# Altium PCB XiBank_V1.0.PcbDoc
Units mm, origin at the board's own origin, x right, y up, seen from the top; angles counter-clockwise.
Board outline 65 x 22.4 mm, 2 copper layers (Top Layer, Bottom Layer), stack 1.07 mm thick; 46 components, 30 nets, 154 pads, 145 vias.
Unrouted connection lines stored in the file: 27.
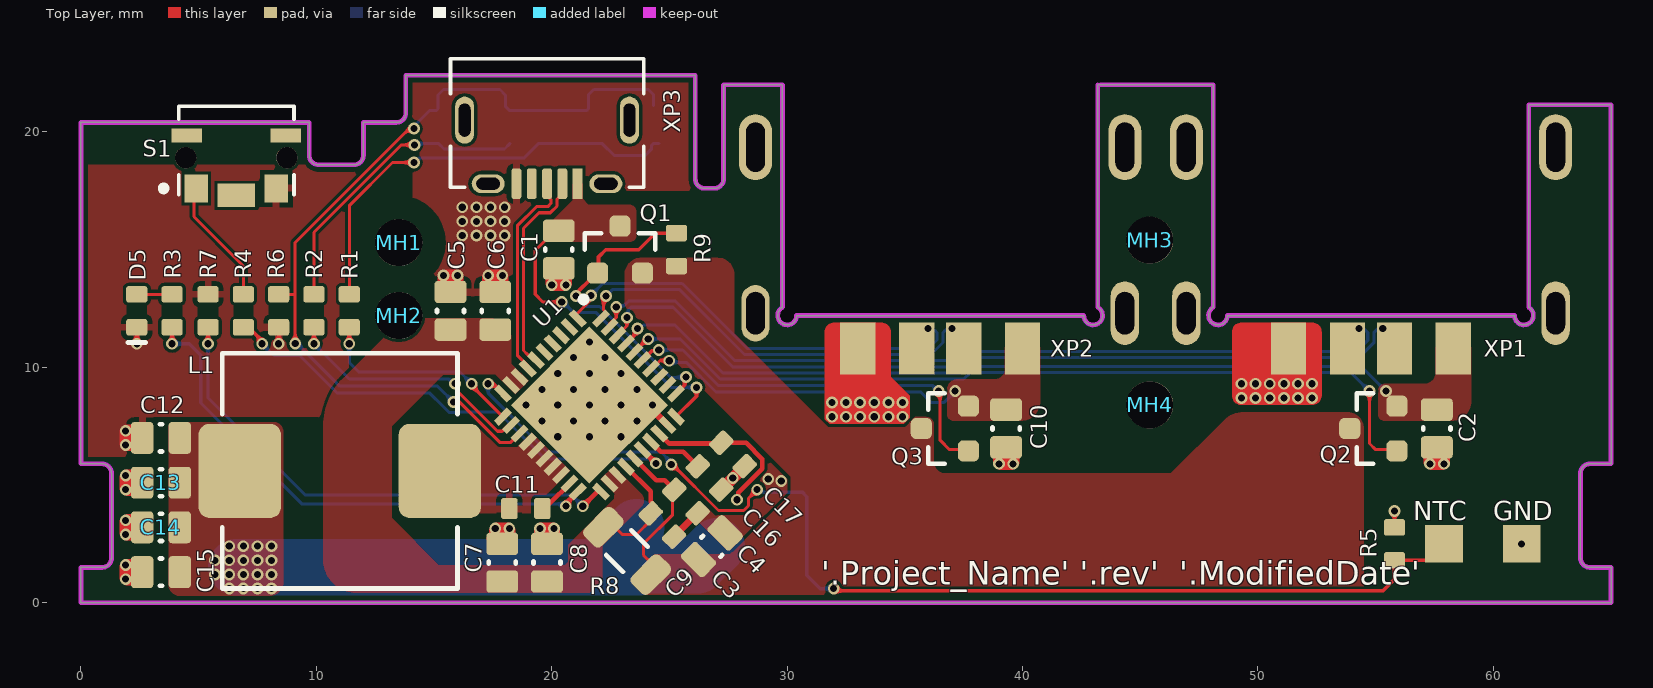
[diagram p0: Top Layer view]
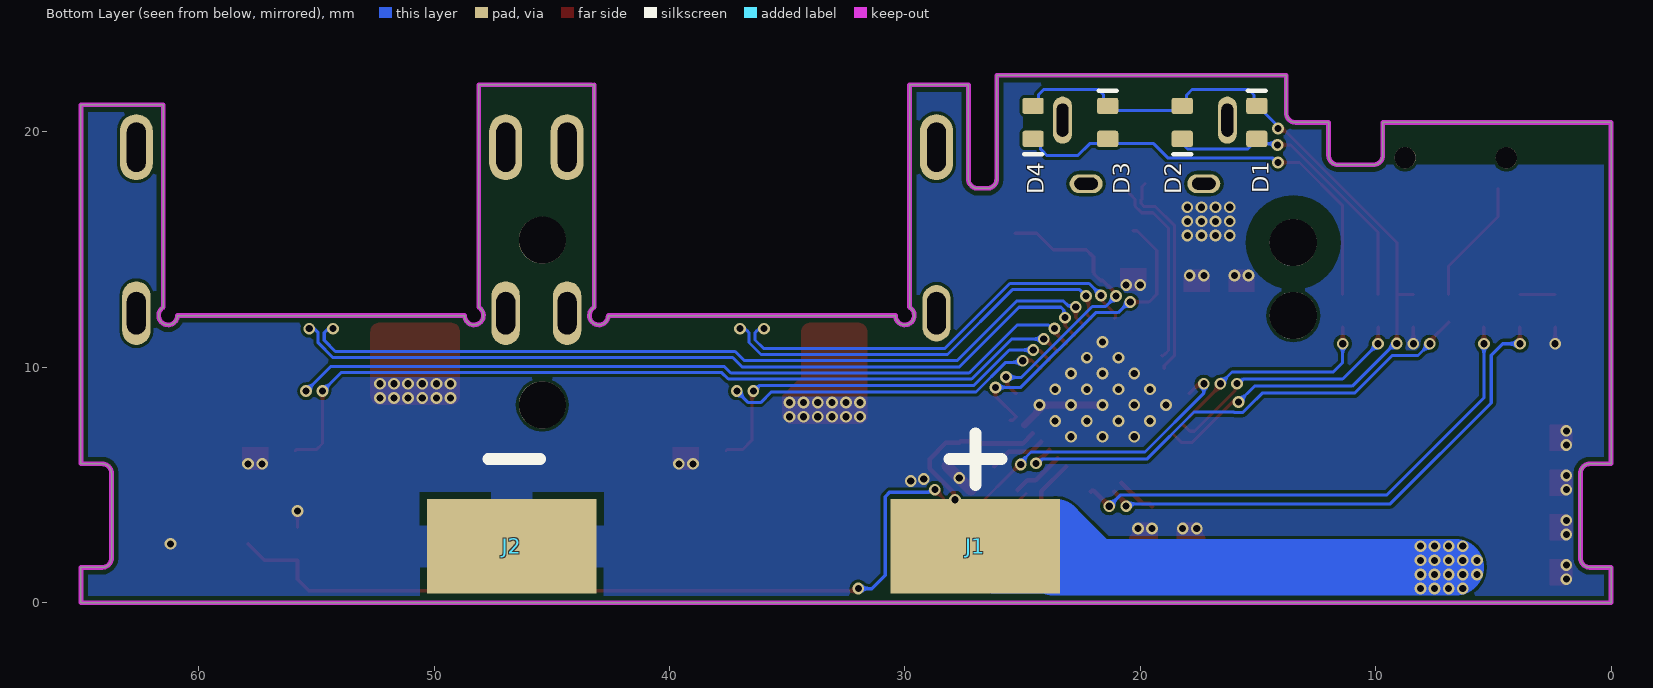
[diagram p1: Bottom Layer view, seen from below]
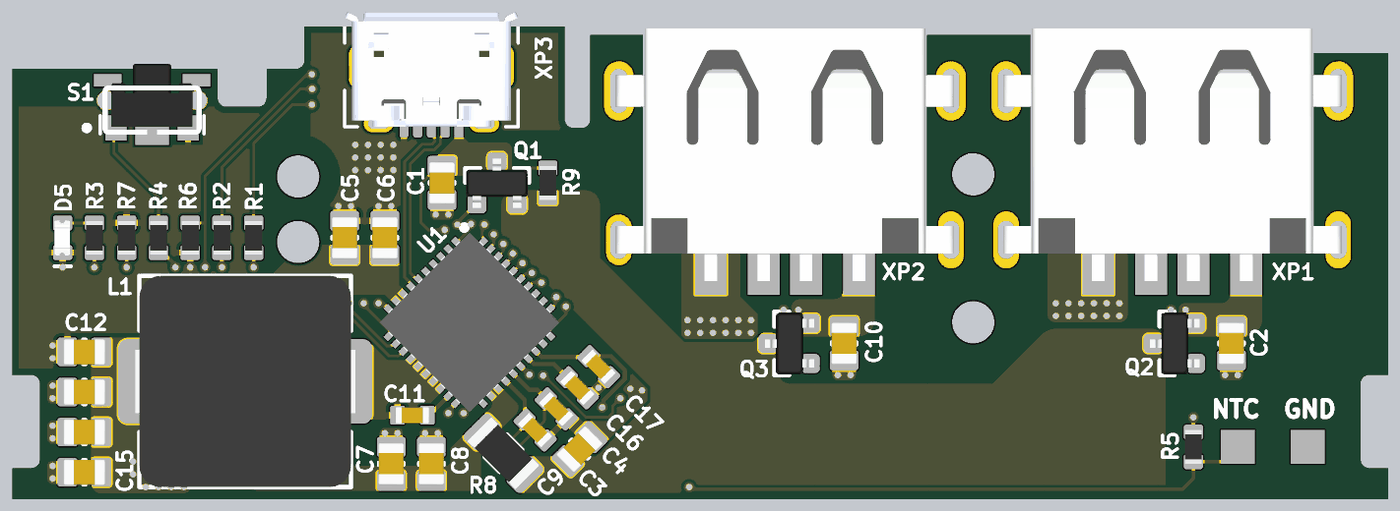
[diagram p2: 3D render of the assembled board from above, using the file's embedded part models]
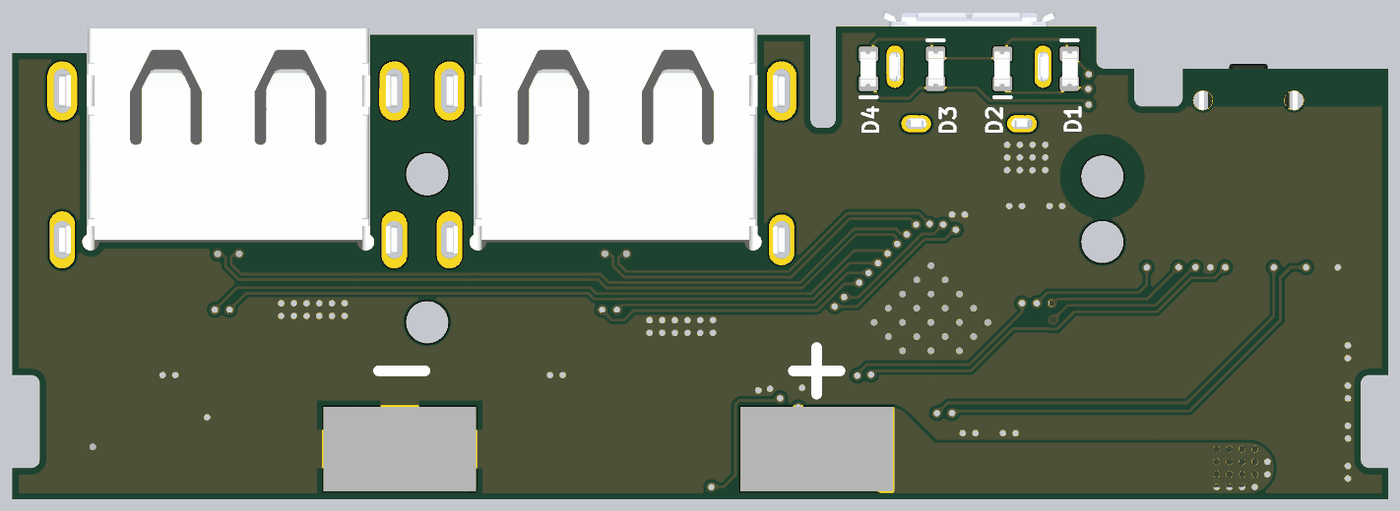
[diagram p3: 3D render of the assembled board from below, using the file's embedded part models]

## Layer stack, top to bottom
Top Solder: solder mask 0.01, Solder Resist, Dk 3.5
Top Layer: signal copper 0.035
Dielectric 1: dielectric 1, FR-4, Dk 4.8
Bottom Layer: signal copper 0.035
Bottom Solder: solder mask 0.01, Solder Resist, Dk 3.5

## Board outline
0,1.5 0.9,1.5 ccw(c0.9,1.9) 1.3,1.9 1.3,5.5 ccw(c0.9,5.5) 0.9,5.9 0,5.9 0,20.4 9.7,20.4 9.7,19 ccw(c10.1,19) 10.1,18.6 11.6,18.6 ccw(c11.6,19) 12,19 12,20.4 13.4,20.4 ccw(c13.4,20.8) 13.8,20.8 13.8,22.4 26.1,22.4 26.1,18 ccw(c26.5,18) 26.5,17.6 26.9,17.6 ccw(c26.9,18) 27.3,18 27.3,22 29.8,22 29.8,12.546 ccw(c30,12.2) 30.4,12.2 42.6,12.2 ccw(c43,12.2) 43.2,12.546 43.2,22 48.1,22 48.1,12.546 ccw(c48.3,12.2) 48.7,12.2 60.9,12.2 ccw(c61.3,12.2) 61.5,12.546 61.5,21.15 65,21.15 65,5.9 64.1,5.9 ccw(c64.1,5.5) 63.7,5.5 63.7,1.9 ccw(c64.1,1.9) 64.1,1.5 65,1.5 65,0 0,0

## Design rules (kind name [scope] priority, off if disabled: settings)
Clearance Clearance_Keep_Out [OnLayer('Keep-Out Layer') vs not InComponent('S1')] p1: gap=0.2 ignorepadtopadclearanceinfootprint=FALSE
Clearance Clearance_MH [InComponent('MH1')] p2: gap=1 ignorepadtopadclearanceinfootprint=FALSE
Clearance [All] p3: gap=0.13 ignorepadtopadclearanceinfootprint=FALSE
DiffPairsRouting [All] p1: maxlimit=0.13 minlimit=0.13 mostfreqgap=0.13 toplayer_minwidth=0.13 toplayer_maxwidth=0.13 toplayer_prefwidth=0.13 bottomlayer_minwidth=0.13 bottomlayer_maxwidth=0.13 bottomlayer_prefwidth=0.13 maxuncoupledlength=12.7
MinimumSolderMaskSliver [All] p1: minsoldermaskwidth=0.07
PolygonConnect PolygonConnect_Vias [isvia] p1: connectstyle=Direct reliefconductorwidth=0.254 reliefentries=4 polygonreliefangle="90 Angle" airgapwidth=0.254
PolygonConnect PolygonConnect_GND_BAT_Pad [InComponent('J2') vs IsNamedPolygon('GND_BOT')] p2: connectstyle=Relief reliefconductorwidth=1.8 reliefentries=4 polygonreliefangle="90 Angle" airgapwidth=0.3
PolygonConnect PolygonConnect_Relied [IsNamedPolygon('GND_TOP') or InComponent('C11')] p3: connectstyle=Relief reliefconductorwidth=0.3 reliefentries=4 polygonreliefangle="90 Angle" airgapwidth=0.2
PolygonConnect PolygonConnect_Direct [All] p4: connectstyle=Direct reliefconductorwidth=0.5 reliefentries=4 polygonreliefangle="90 Angle" airgapwidth=0.2
RoutingVias [All] p1: holewidth=0.711 width=1.27 viastyle="Through Hole" minholewidth=0.3 minwidth=0.5 maxholewidth=0.711 maxwidth=1.27
SilkToSilkClearance [All] p1: silktosilkclearance=0.1
SilkToSolderMaskClearance [IsPad] p1: minsilkscreentomaskgap=0.15 clearancetoexposedcopper=TRUE
SolderMaskExpansion SolderMaskExpansion_Vias [isvia] p1: expansion=0.07 istentingtop=TRUE
SolderMaskExpansion [All] p2: expansion=0.07 istentingtop=FALSE
Width [All] p1: maxlimit=3 minlimit=0.13 preferedwidth=0.2
26 further rules are at their usual default settings.

## Classes and differential pairs
differential pair DB: +DB_P -DB_N
differential pair DA2: +DA2_P -DA2_N
differential pair DA1: +DA1_P -DA1_N

## Components (designator, comment, footprint, x,y, rotation, side; value= is the part's Value field where it differs from the comment)
C1 "10u" CC0805#1 20.3,15 r270 top
C2 "10u" CC0805#1 57.6,7.4 r270 top
C3 "100n" CC0603#1 24.7,3.3 r315 top
C4 "100n" CC0603#1 25.7,4.3 r315 top
C5 "22u" CC0805#1 15.7,12.4 r90 top
C6 "22u" CC0805#1 17.6,12.4 r90 top
C7 "22u" CC0805#2 17.9,1.7 r90 top
C8 "22u" CC0805#2 19.8,1.7 r90 top
C9 "22u" CC0805#2 26.8,2.4 r45 top
C10 "10u" CC0805#1 39.3,7.4 r270 top
C11 "100n" CC0603#2 18.9,4 r180 top
C12 "22u" CC0805#1 3.4,7 r180 top
C13 "22u" CC0805#1 3.4,5.1 r180 top
C14 "22u" CC0805#1 3.4,3.2 r180 top
C15 "22u" CC0805#1 3.4,1.3 r180 top
C16 "2.2uF" CC0603#1 26.7,5.3 r315 top
C17 "2.2uF" CC0603#1 27.7,6.3 r315 top
D1 "LTW-C191DS5" LED0603 15.05,20.4 r270 bottom
D2 "LTW-C191DS5" LED0603 18.217,20.4 r90 bottom
D3 "LTW-C191DS5" LED0603 21.383,20.4 r270 bottom
D4 "LTW-C191DS5" LED0603 24.55,20.4 r90 bottom
D5 "LTW-C191DS5" LED0603 2.375,12.4 r90 top
J1 "Header 1pin" "1 Hole" 27,2.4 r180 bottom
J2 "Header 1pin" "1 Hole" 46.7,2.4 r180 bottom
L1 "HPI1040-2R2" HPI1040100 11,5.6 r180 top value="2.2 uH"
MH1 "MH_3.5_NONPLATED" MH_3.5_NONPLATED 13.5,15.3 r0 top
MH2 "MH_3.5_NONPLATED" MH_3.5_NONPLATED 13.5,12.2 r0 top
MH3 "MH_3.5_NONPLATED" MH_3.5_NONPLATED 45.4,15.4 r0 top
MH4 "MH_3.5_NONPLATED" MH_3.5_NONPLATED 45.4,8.4 r0 top
Q1 "IRLML6402TRPBF" SOT23-3 22.9,15 r270 top
Q2 "AO3416" SOT23-3 54.9,7.4 r0 top
Q3 "AO3416" SOT23-3 36.7,7.4 r0 top
R1 "100R" RC0603 11.4,12.4 r90 top
R2 "100R" RC0603 9.9,12.4 r90 top
R3 "100R" RC0603 3.875,12.4 r90 top
R4 "1k" RC0603 6.9,12.4 r90 top
R5 "82k" RC0603 55.8,2.5 r90 top
R6 "NC" RC0603 8.4,12.4 r90 top
R7 "169k" RC0603 5.4,12.4 r90 top
R8 "0.01R" RC1206 23.2,2.2 r315 top
R9 "10k" RC0603 25.3,15 r270 top
S1 "" SW_LS10N2T_CIT 6.6,19.203 r180 top
U1 "IP5328P" QFN50P600X600X80-41N 21.599,8.393 r315 top
XP1 "USB-A Conn" 0480372200#1 54.8,14.975 r0 top
XP2 "USB-A Conn" 0480372200#2 36.5,14.975 r0 top
XP3 "ZX80-B-5P" 10118194-0001LF 19.8,20.5 r180 top

## Footprints (in the part's own frame and the unit in brackets; to place one, negate y for a bottom-side part, rotate by r counter-clockwise, add the part's x,y. Pads: shape width x height; smd on the part's side, far side on the other; paste and mask are expansions set on the pad)
"1 Hole" [mm] "1 Hole"
  rect 7.2x4 smd: 1(0,0)
10118194-0001LF [mm] "Micro USB B Right angled Socket"
  rect 0.42x1.3 smd: 1(-1.3,2.7)
  rrect50% 0.42x1.3 smd: 2(-0.65,2.7) 3(0,2.7) 4(0.65,2.7) 5(1.3,2.7)
  oval 1.4x0.8 hole 0.5 slot 1 at 0 deg: 6(2.5,2.7) 9(-2.5,2.7)
  oval 0.8x2 hole 0.5 slot 1.4 at 90 deg: 7(3.5,0) 8(-3.5,0)
  silkscreen extent -4.1,-2.6 4.1,2.85, body extent -4.1,-2.58 4.1,2.85, height 2.67
0480372200#1 [mm] "USB-A (USB TYPE-A) USB 2.0 Plug Connector 4 Position Surface Mount, Right Angle; Through Hole"
  rect 1.5x2.2 smd: 1(3.499,-4.175) 2(1,-4.175) 3(-1,-4.175) 4(-3.501,-4.175)
  oval 1.2x2.7 hole 0.8 slot 1.8 at 90 deg: 5(-7.845,-2.675) 5(7.845,-2.675)
  oval 1.4x2.8 hole 0.8 slot 2.1 at 90 deg: 6(-7.845,4.375) 6(7.845,4.375)
  body extent -8,-4.62 7.99,7.33, height 3.76
0480372200#2 [mm] "USB-A (USB TYPE-A) USB 2.0 Plug Connector 4 Position Surface Mount, Right Angle; Through Hole"
  rect 1.5x2.2 smd: 1(3.499,-4.175) 2(1,-4.175) 3(-1,-4.175) 4(-3.501,-4.175)
  oval 1.2x2.4 hole 0.8 slot 1.8 at 90 deg: 5(-7.845,-2.675)
  oval 1.2x2.7 hole 0.8 slot 1.8 at 90 deg: 5(7.845,-2.675)
  oval 1.4x2.8 hole 0.8 slot 2.1 at 90 deg: 6(-7.845,4.375) 6(7.845,4.375)
  body extent -8,-4.62 7.99,7.33, height 3.76
CC0603#1 [mm] "Chip Capacitor, 2-Leads, Body 1.6x0.8mm"
  rrect30% 0.7x0.9 smd: 1(-0.7,0) 2(0.7,0)
  Top Layer pour cut-out: -0.483,0.432 -0.483,-0.432 0.483,-0.432 0.483,0.432
  body extent -0.8,-0.4 0.8,0.4, height 0.9
CC0603#2 [mm] "Chip Capacitor, 2-Leads, Body 1.6x0.8mm"
  rrect30% 0.7x0.9 smd: 1(-0.7,0) 2(0.7,0)
  body extent -0.8,-0.4 0.8,0.4, height 0.9
CC0805#1 [mm] "Chip Capacitor, 2-Leads, Body 2.0x1.25mm"
  rrect30% 0.95x1.35 smd: 1(-0.8,0) 2(0.8,0)
  Top Layer pour cut-out: -0.325,0.525 0.325,0.525 0.325,-0.525 -0.325,-0.525
  silkscreen extent -0.05,-0.57 0.05,0.58, body extent -1,-0.62 1,0.63, height 1.35
CC0805#2 [mm] "Chip Capacitor, 2-Leads, Body 2.0x1.25mm"
  rrect30% 0.95x1.35 smd: 1(-0.8,0) 2(0.8,0)
  silkscreen extent -0.05,-0.57 0.05,0.58, body extent -1,-0.62 1,0.63, height 1.35
HPI1040100 [mm]
  rrect26% 3.5x4 smd: 1(-4.25,0) 2(4.25,0)
  silkscreen extent -5,-5 5,5, body extent -5.2,-5 5.2,5, height 4.01
LED0603 [mm] "Molded Diode, 2-Leads, Body"
  rrect30% 0.7x0.9 smd: 1(-0.7,0) 2(0.7,0)
  Top Layer pour cut-out: -0.483,0.432 -0.483,-0.432 0.483,-0.432 0.483,0.432
  silkscreen extent -1.35,-0.38 -1.35,0.37, body extent -0.83,-0.34 0.82,0.38, height 0.68
MH_3.5_NONPLATED [mm] "Mounting hole footprint not plated, Misc"
  round 2 hole 2 unplated: 0(0,0)
QFN50P600X600X80-41N [mm]
  rect 0.8x0.3 smd mask+0.05: 1(-2.95,2.25) 2(-2.95,1.75) 3(-2.95,1.25) 4(-2.95,0.75) 5(-2.95,0.25) 6(-2.95,-0.25) 7(-2.95,-0.75) 8(-2.95,-1.25) 9(-2.95,-1.75) 10(-2.95,-2.25) 21(2.95,-2.25) 22(2.95,-1.75) 23(2.95,-1.25) 24(2.95,-0.75) 25(2.95,-0.25) 26(2.95,0.25) 27(2.95,0.75) 28(2.95,1.25) 29(2.95,1.75) 30(2.95,2.25)
  rect 0.3x0.8 smd mask+0.05: 11(-2.25,-2.95) 12(-1.75,-2.95) 13(-1.25,-2.95) 14(-0.75,-2.95) 15(-0.25,-2.95) 16(0.25,-2.95) 17(0.75,-2.95) 18(1.25,-2.95) 19(1.75,-2.95) 20(2.25,-2.95) 31(2.25,2.95) 32(1.75,2.95) 33(1.25,2.95) 34(0.75,2.95) 35(0.25,2.95) 36(-0.25,2.95) 37(-0.75,2.95) 38(-1.25,2.95) 39(-1.75,2.95) 40(-2.25,2.95)
  rect 4.72x4.72 smd mask+0.05: 41(0,0)
  silkscreen extent -3.47,2.88 -3.23,3.12, body extent -3.05,-3.05 3.05,3.05, height 0.8
RC0603 [mm] "Chip Resistor, 2-Leads, Body 1.6x0.8mm, IPC Medium Density"
  rrect30% 0.7x0.9 smd: 1(-0.7,0) 2(0.7,0)
  Top Layer pour cut-out: -0.483,0.432 -0.483,-0.432 0.483,-0.432 0.483,0.432
  body extent -0.8,-0.4 0.8,0.4, height 0.49
RC1206 [mm] "Chip Resistor, 2-Leads, Body 3.1x1.6mm, IPC Medium Density"
  rrect50% 1.05x1.7 smd: 1(-1.425,0) 2(1.425,0)
  silkscreen extent -0.5,-0.75 0.5,0.75, body extent -1.6,-0.8 1.6,0.8, height 0.55
SOT23-3 [mm] "SOT23, 3-Leads, Body 3,0x2,6mm (max), Pitch 0,95mm, IPC Medium Density"
  rrect50% 0.9x0.9 smd: 1(1,-0.95) 2(1,0.95) 3(-1,0)
  silkscreen extent -0.7,-1.5 0,1.5, body extent -1.15,-1.46 1.19,1.46, height 1
SW_LS10N2T_CIT [mm]
  rect 1x1.2 smd: 1(1.7,1.603) 2(-1.7,1.603)
  round 0.9 hole 0.9 mask+0.05: 3(-2.15,0.303) 4(2.15,0.303)
  rect 1.3x0.6 smd: 5(-2.1,-0.647) 6(2.1,-0.647)
  rect 1.6x1 smd: 7(0,1.903)
  silkscreen extent -2.45,-1.88 3.19,1.88, body extent -2.34,-1.42 2.34,1.93, height 1.87

## Part data
C1 C2 C10: library part CC0805K-X7R-10V0-10U, "10 µF ±10% 25V Ceramic Capacitor X5R 0805 (2012 Metric)", Case=0805, Manufacturer="Samsung Electro-Mechanics", Manufacturer Part Number=CL21A106KAYNNNE, Temperature="-55 - +85 C", Tolerance=10%, Voltage=25V, Component Type=Standard, ComponentLink2Description=Datasheet, ComponentLink2URL=http://www.yageo.com/pdf/UPY-GPHC_X7R_6.3V-to-50V_3.pdf, Material=X5R, Pb Free=Yes
C3 C4 C11: library part CC0603K-X7R-50V0-100N, "0.1 µF ±10% 50V Ceramic Capacitor X7R 0603 (1608 Metric)", Case=0603, Manufacturer="Samsung Electro-Mechanics", Manufacturer Part Number=CL10B104KB8NNNC, Temperature="-55 - +125 C", Tolerance=10%, Voltage=50V, Component Type=Standard, ComponentLink2Description=Datasheet, Material=X7R, Pb Free=Yes
  C3 C4: ComponentLink2URL=http://www.yageo.com/pdf/UPY-GPHC_X7R_6.3V-to-50V_3.pdf
  C11: ComponentLink2URL=https://media.digikey.com/pdf/Data%20Sheets/Samsung%20PDFs/CL10B104KB8NNNC_Spec.pdf
C5 C6 C7 C8 C9: library part CC0805K-X7R-10V0-10U, "22 µF ±20% 25V Ceramic Capacitor X5R 0805 (2012 Metric)", Case=0805, Manufacturer="Samsung Electro-Mechanics", Manufacturer Part Number=CL21A226MAYNNNE, Temperature="-55 - +85 C", Tolerance=10%, Voltage=25V, Component Type=Standard, ComponentLink2Description=Datasheet, Material=X5R, Pb Free=Yes
  C5 C6 C7 C9: ComponentLink2URL=http://www.yageo.com/pdf/UPY-GPHC_X7R_6.3V-to-50V_3.pdf
  C8: ComponentLink2URL=https://media.digikey.com/pdf/Data%20Sheets/Samsung%20PDFs/CL21A226MAYNNNE_Spec.pdf
C12 C13 C14 C15: library part CC0805K-X7R-10V0-10U, "22 µF ±20% 16V Ceramic Capacitor X5R 0805 (2012 Metric)", Case=0805, Manufacturer="Samsung Electro-Mechanics", Manufacturer Part Number=CL21A226MOCLRNC, Temperature="-55 - +125 C", Tolerance=10%, Voltage=16V, Component Type=Standard, ComponentLink2Description=Datasheet, Material=X5R, Pb Free=Yes
  C12 C13 C15: ComponentLink2URL=http://www.yageo.com/pdf/UPY-GPHC_X7R_6.3V-to-50V_3.pdf
  C14: ComponentLink2URL=https://media.digikey.com/pdf/Data%20Sheets/Samsung%20PDFs/CL21A226MOCLRNC_Spec.pdf
C16 C17: library part CC0603K-X7R-50V0-100N, "2.2 µF ±10% 16V Ceramic Capacitor X5R 0603 (1608 Metric)", Case=0603, Manufacturer="Samsung Electro-Mechanics", Manufacturer Part Number=CL10A225KO8NNNC, Temperature="-55 - +85 C", Tolerance=10%, Voltage=16V, Component Type=Standard, ComponentLink2Description=Datasheet, Material=X5R, Pb Free=Yes
  C16: ComponentLink2URL=http://www.yageo.com/pdf/UPY-GPHC_X7R_6.3V-to-50V_3.pdf
  C17: ComponentLink2URL=https://media.digikey.com/pdf/Data%20Sheets/Samsung%20PDFs/CL10A225KO8NNNC_Spec.pdf
D1 D2 D3 D4 D5: library part TLMY1000-GS08, "White LED Indication - Discrete 2.93V 0603 (1608 Metric)", Case=LED0603, Color=White, Current=5mA, Manufacturer="Lite-On Inc.", Voltage=2.93V, Component Type=Standard, ComponentLink2Description=Datasheet, Manufacturer Part Number=LTW-C191DS5
  D1 D3 D4: ComponentLink2URL=http://www.vishay.com/docs/83172/tlmo1000.pdf
  D5: ComponentLink2URL=https://optoelectronics.liteon.com/upload/download/DS22-2006-062/LTW-C191DS5.PDF
J1 J2: library part HEADER_2.54_THR_1x1P_MV, "THRU header 1pins, MALE, Vertical, 2.54mm pitch", Manufacturer Part Number=TSW-101-07-L-S, Temperature="-40 - +105 C", Case=HEADER_2.54_THR_1x1P_MV, Component Type=Standard, ComponentLink2Description=Datasheet, ComponentLink2URL=http://suddendocs.samtec.com/catalog_english/tsw_th.pdf, Part Number=HEADER_2.54_THR_1x1P_MV, Pb Free=Yes, Pins number=1, Published=02-Jan-12, Publisher=dlitvinenko, STATUS=CHECKED
L1: library part PSDB1005NT681, "SMD Power Inductor, 2.2uH, 12A, 6.5mΩ", Case=10x10x3.8mm, DC Current=12A, DC Resistance=6.5mΩ, Manufacturer=FERROCORE, Temperature=-55...125°C, Tolerance=20%, Component Type=Standard, ComponentLink2Description=Datasheet, ComponentLink2URL=http://www.viking.tw/product/PSDB.pdf, Manufacturer Part Number=HPI1040-2R2, Part Number=HPI1040-2R2, Pb Free=Yes, Published=06.04.2014, Publisher=dlegkobyt, STATUS=CHECKED
MH1 MH2 MH3 MH4: "Mounting hole misc, non plated", Part Number=MH_3.5_NONPLATED
Q1: library part IRLML6402, "P-Channel 20 V 3.7A (Ta) 1.3W (Ta) Surface Mount Micro3™/SOT-23", Case=SOT23-3, Current=-3.7A, Manufacturer="Infineon Technologies", Temperature="-50 - +150 C", Voltage CEO=-20V, Analogs="AO3401A, AO3415, AO3407A", Component Type=Standard, ComponentLink2Description=Datasheet, ComponentLink2URL=https://www.infineon.com/dgdl/irlml6402pbf.pdf?fileId=5546d462533600a401535668d5c2263c, Manufacturer Part Number=IRLML6402TRPBF, Marking=E6RRA, Pb Free=Yes
Q2 Q3: library part IRLML2502GPbF, "N-Channel 20 V 6.5A (Ta) 1.4W (Ta) Surface Mount SOT-23-3", Case=SOT23-3, Current=6.5A, Manufacturer="Alpha & Omega Semiconductor Inc.", Temperature="-50 - +150 C", Voltage CEO=20V, Analogs=DMN3404L, Component Type=Standard, ComponentLink2Description=Datasheet, Manufacturer Part Number=AO3416, Pb Free=Yes
  Q2: ComponentLink2URL=https://media.digikey.com/pdf/Data%20Sheets/Alpha%20&%20Omega/AO3416.pdf
  Q3: ComponentLink2URL=http://www.irf.com/product-info/datasheets/data/irlml2502gpbf.pdf
R1 R2 R3: library part RC0603F-100R, "100 ±1% 0.1W, 1/10W Chip Resistor 0603 (1608 Metric) Moisture Resistant Thick Film", Case=0603, Manufacturer=YAGEO, Manufacturer Part Number=RC0603FR-07100RL, Power=1/10W, Temperature="-55 - +155 C", Tolerance=1%, Voltage=50V, Component Type=Standard, ComponentLink2Description=Datasheet, ComponentLink2URL=http://www.yageo.com/pdf/PYu-RC0603_51_RoHS_L_4.pdf, Pb Free=Yes
R4: library part RC0603F-1K, "1k ±1% 0.1W, 1/10W Chip Resistor 0603 (1608 Metric) Moisture Resistant Thick Film", Case=0603, Manufacturer=YAGEO, Manufacturer Part Number=RC0603FR-071KL, Power=1/10W, Temperature="-55 - +155 C", Tolerance=1%, Voltage=50V, Component Type=Standard, ComponentLink2Description=Datasheet, ComponentLink2URL=http://www.yageo.com/pdf/PYu-RC0603_51_RoHS_L_4.pdf, Pb Free=Yes
R5: library part RC0603F-82K, "82 kOhms ±1% 0.1W, 1/10W Chip Resistor 0603 (1608 Metric) Moisture Resistant Thick Film", Case=0603, Manufacturer=YAGEO, Manufacturer Part Number=RC0603FR-0782KL, Power=1/10W, Temperature="-55 - +155 C", Tolerance=1%, Voltage=50V, Component Type=Standard, ComponentLink2Description=Datasheet, ComponentLink2URL=https://www.yageo.com/upload/media/product/productsearch/datasheet/rchip/PYu-RC_Group_51_RoHS_L_11.pdf, Pb Free=Yes
R6: library part RC0603F-200K, "200k ±1% 0.1W, 1/10W Chip Resistor 0603 (1608 Metric) Moisture Resistant Thick Film", Case=0603, Manufacturer=YAGEO, Manufacturer Part Number=RC0603FR-07200KL, Power=1/10W, Temperature="-55 - +155 C", Tolerance=1%, Voltage=50V, Component Type=Standard, ComponentLink2Description=Datasheet, ComponentLink2URL=http://www.yageo.com/pdf/PYu-RC0603_51_RoHS_L_4.pdf, Pb Free=Yes
R7: library part RC0603F-200K, "169k ±1% 0.1W, 1/10W Chip Resistor 0603 (1608 Metric) Moisture Resistant Thick Film", Case=0603, Manufacturer=YAGEO, Manufacturer Part Number=RC0603FR-07169KL, Power=1/10W, Temperature="-55 - +155 C", Tolerance=1%, Voltage=50V, Component Type=Standard, ComponentLink2Description=Datasheet, ComponentLink2URL=http://www.yageo.com/pdf/PYu-RC0603_51_RoHS_L_4.pdf, Pb Free=Yes
R8: library part RC1206F-0R01, "10 mOhms ±1% 0.25W, 1/4W Chip Resistor 1206 (3216 Metric) Automotive AEC-Q200, Current Sense, Moisture Resistant Thick Film", Case=1206, Manufacturer=YAGEO, Manufacturer Part Number=RL1206FR-070R01L, Power=1/4W, Temperature="-55 - +155 C", Tolerance=1%, Voltage=200V, Component Type=Standard, ComponentLink2Description=Datasheet, ComponentLink2URL=https://www.yageo.com/upload/media/product/productsearch/datasheet/rchip/PYu-RL_Group_521_RoHS_L_2.pdf, Pb Free=Yes
R9: library part RC0603F-10K, "10k ±1% 0.1W, 1/10W Chip Resistor 0603 (1608 Metric) Moisture Resistant Thick Film", Case=0603, Manufacturer=YAGEO, Manufacturer Part Number=RC0603FR-0710KL, Power=1/10W, Temperature="-55 - +155 C", Tolerance=1%, Voltage=50V, Component Type=Standard, ComponentLink2Description=Datasheet, ComponentLink2URL=http://www.yageo.com/pdf/PYu-RC0603_51_RoHS_L_4.pdf, Pb Free=Yes
S1: library part LS10N2T, "Tactile Switch SPST-NO Side Actuated Surface Mount, Right Angle", Manufacturer=Citizen, C="Copyright (C) 2021 Accelerated Designs. All rights reserved", Copyright="Copyright (C) 2022 Ultra Librarian. All rights reserved.", Digi-Key_Part_Number_1=1642-1308-2-ND, Digi-Key_Part_Number_2=1642-1308-1-ND, Digi-Key_Part_Number_3=1642-1308-6-ND, Manufacturer Part Number=LS10N2T
U1: "Fully-Integrated Bi-directional PD3.0 and Fast Charge Power Bank SOC with Multiple Input and Output Ports", Manufacturer="INJOINIC Technology", Datasheet Link=https://datasheetspdf.com/pdf-file/1261761/Injoinic/IP5328P/1, Height=0.8mm, Manufacturer Part Number=IP5328P
XP1 XP2: library part 0480372200, "USB-A (USB TYPE-A) USB 2.0 Plug Connector 4 Position Surface Mount, Right Angle", Case="USB TYPE-A", Manufacturer=NULL, Temperature="-20 - +85 C", Component Type=Standard, ComponentLink2Description=Datasheet, Manufacturer Part Number=NULL, Pb Free=Yes, Pins number=4
  XP2: ComponentLink2URL=https://www.molex.com/pdm_docs/sd/480372200_sd.pdf
XP3: library part 10118194-0001LF, "Micro USB B Right Angled  Socket, SMD", Manufacturer=FCI, Temperature="-25 - +85 C", Case=10118194-0001LF, Component Type=Standard, ComponentLink2Description=Datasheet, ComponentLink2URL=http://portal.fciconnect.com/Comergent//fci/drawing/10118194.pdf, Manufacturer Part Number=10118194-0001LF, Pb Free=Yes, Pins number=5

## Free pads (board coordinates)
  rect 1.6x1.6 smd: 3(57.9,2.5) 4(61.2,2.5)

## Via types
v1: diameter 0.5, hole 0.3, Top Layer to Bottom Layer, tented both sides, 145 vias

## Nets (pads, with @x,y where several pads share a name; then routed paths per layer and width w, separated by ;. In a path a pad name is that pad's centre, name@x,y a point inside that pad or via, vN(x,y) a via of type N, cw(c..) or ccw(c..) an arc to the next point about the centre after c; other vN are vias at no path point)
+VMID: C4.1 C9.1 Q1.2 Q2.3 Q3.3 R8.2 R9.2 U1.25 | length 6.5
  Top Layer w0.13: R8.2 24.208,1.713 23.9,2.021 23.9,2.5 25.134,3.734 25.134,4.357 C4.1@24.85,4.641
  Top Layer w0.2: U1.25 24.438,5.2 24.8,5.2 C4.1@25.208,4.792
+VSYS: C3.1 C5.1 C6.1 C7.1 C8.1 R8.1 U1.8 U1.9 U1.22 U1.23 U1.24 | length 5.2
  Top Layer w0.13: R8.1 22.688,3.208 22.995,2.9 23.6,2.9 24.205,3.505 C3.1
  Top Layer w0.2: U1.24 24.205,4.726 24.205,4.286 24.274,4.217 24.274,3.864 C3.1
BST: C11.1 U1.19 | length 1.7
  Top Layer w0.2: C11.1@19.5,4.1 19.6,4.2 19.9,4.2 U1.19@20.8,5.1
DA1_N: U1.38 XP1.2 | length 35.4
  Top Layer w0.13: U1.38 23.193,11.755 v1(23.193,12.107)
  Bottom Layer w0.13: v1(23.193,12.107) 23.243,12.157 23.243,12.427 23.368,12.552 25.148,12.552 27.68,10.02 36.92,10.02 37.315,10.415 54.302,10.415 54.924,11.036 54.924,11.473 55,11.55 55.009,11.55 55.2,11.741 v1@55.3,11.741
  other v1: 55.3,11.641
DA1_P: U1.39 XP1.3 | length 35.2
  Top Layer w0.13: U1.39 22.447,11.824 22.739,12.116 v1(22.739,12.561)
  Bottom Layer w0.13: v1(22.739,12.561) 22.789,12.61 23.059,12.61 23.26,12.812 25.256,12.812 27.788,10.28 36.812,10.28 37.207,10.675 54.194,10.675 54.664,11.144 54.664,11.473 54.587,11.55 54.578,11.55 54.387,11.741 v1@54.287,11.741
  other v1: 54.287,11.641
DA2_N: U1.40 XP2.2 | length 17.7
  Top Layer w0.13: U1.40 22.27,12.247 22.27,12.367 22.2,12.437 v1@22.2,13
  Bottom Layer w0.13: v1(22.3,13.025) 22.575,13.3 25.432,13.3 28.192,10.54 36.108,10.54 36.624,11.056 36.624,11.473 36.7,11.55 36.709,11.55 36.9,11.741 v1@37,11.741
  other v1: 37,11.641
DA2_P: U1.1 XP2.3 | length 18.3
  Top Layer w0.13: U1.1 21.047,12.127 21.047,12.247 21.599,12.799 21.599,12.978 21.666,13.045 v1(21.666,13.055)
  Bottom Layer w0.13: v1(21.666,13.055) 22.171,13.56 25.54,13.56 28.3,10.8 36,10.8 36.364,11.164 36.364,11.473 36.287,11.55 36.278,11.55 36.087,11.741 v1@35.987,11.741
  other v1: 35.987,11.641
DB_N: U1.6 XP3.2 | length 8.4
  Top Layer w0.13: U1.6@19.091,10.501 19.069,10.479 19.039,10.479 18.985,10.533 18.8,10.718 18.8,15.905 19.461,16.566 19.938,16.566 20.22,16.847 20.22,17.139 20.45,17.369 XP3.2
DB_P: U1.7 XP3.3 | length 9
  Top Layer w0.13: U1.7 18.982,10.069 18.752,10.299 18.752,10.3 18.54,10.512 18.54,16.013 19.353,16.826 19.831,16.826 19.96,16.955 19.96,17.116 19.92,17.155 19.92,17.68 XP3.3
GND: C1.2 C2.2 C3.2 C4.2 C5.2 C6.2 C7.2 C8.2 C9.2 C10.2 C12.2 C13.2 C14.2 C15.2 C16.2 C17.2 D5.1 J2.1 pad.4 R5.2 R6.1 R7.2 S1.2 U1.29 U1.41 XP1.4 XP2.4 XP3.5 | length 9.5
  Top Layer w0.13: R5.2 v1@55.8,3.8
  Top Layer w0.15: v1(2.375,11) D5.1 ; v1(8.4,11) R6.1
  Top Layer w0.3: v1(21.599,8.393) 24.073,8.393 U1.29 ; C3.2 C4.2
  Top Layer w0.5: C7.2@17.475,2.725 17.7,2.5 C7.2 ; C8.2 20,2.5 C8.2@20.225,2.725 ; C16.2 C17.2
  other v1: 1.9,1 1.9,1.6 61.2,2.5 1.9,2.9 17.6,3.15 18.2,3.15 19.5,3.15 20.1,3.15 1.9,3.5 55.8,3.9 1.9,4.8 29.75,5.175 29.197,5.252 27.69,5.3 1.9,5.4 39,5.9 39.6,5.9 57.3,5.9 57.9,5.9 1.9,6.7 20.255,7.049 21.599,7.049 22.942,7.049 1.9,7.3 19.583,7.721 20.927,7.721 22.27,7.721 23.614,7.721 31.9,7.9 32.5,7.9 33.1,7.9 33.7,7.9 34.3,7.9 34.9,7.9 18.912,8.393 20.255,8.393 22.942,8.393 24.286,8.393 31.9,8.5 32.5,8.5 33.1,8.5 33.7,8.5 34.3,8.5 34.9,8.5 49.3,8.7 49.9,8.7 50.5,8.7 51.1,8.7 51.7,8.7 52.3,8.7 19.583,9.065 20.927,9.065 22.27,9.065 23.614,9.065 49.3,9.3 49.9,9.3 50.5,9.3 51.1,9.3 51.7,9.3 52.3,9.3 20.255,9.736 21.599,9.736 22.942,9.736 20.927,10.408 22.27,10.408 21.599,11.08 20,13.5 20.6,13.5 15.4,13.9 16,13.9 17.3,13.9 17.9,13.9 16.2,15.6 16.8,15.6 17.4,15.6 18,15.6 16.2,16.2 16.8,16.2 17.4,16.2 18,16.2 16.2,16.8 16.8,16.8 17.4,16.8 18,16.8
KEY: R4.1 U1.26 | length 21
  Top Layer w0.15: R4.1@6.9,11.917 7.7,11.117 v1(7.7,11)
  Top Layer w0.2: U1.26 v1@24.488,5.857 ; v1(24.429,5.923) v1@24.493,5.923
  Bottom Layer w0.13: v1(7.7,11) 8.2,10.5 9.3,10.5 10.9,8.9 14.819,8.9 15.379,8.34 15.64,8.079 16.009,8.079 16.029,8.1 17.72,8.1 19.72,6.1 24.168,6.1 24.345,5.923 v1(24.429,5.923)
LED1: R1.1 U1.11 | length 9
  Top Layer w0.15: v1(11.4,11) R1.1 ; v1(16.6,9.3) 16.6,9.22 U1.11
  Bottom Layer w0.13: v1(11.4,11) 11.4,10.2 11.8,9.8 16.1,9.8 v1(16.6,9.3)
LED2: R2.1 U1.12 | length 10.9
  Top Layer w0.13: v1(15.896,9.304) 15.967,9.233 15.967,9.011 17.185,7.793 17.696,7.282 17.893,7.282 18.155,7.544 U1.12
  Top Layer w0.15: v1(9.9,11) R2.1
  Bottom Layer w0.13: v1(9.9,11) 11.4,9.5 15.635,9.5 15.831,9.304 v1(15.896,9.304)
LED3: D1.1 D2.2 D3.1 D4.2 R6.2 U1.13 | length 36.6
  Top Layer w0.13: R6.2 9.1,13.1 ; v1@9.1,11.05 9.1,13.1 ; v1@14.147,20.2 14,20.2 9.1,15.3 9.1,13.1 ; v1(15.824,8.524) 15.895,8.595 16.003,8.595 16.004,8.596 16.13,8.471 16.14,8.471 17.81,6.8 18.238,6.8 U1.13
  Bottom Layer w0.13: v1(9.104,11.006) 9.194,11.006 11,9.2 15.149,9.2 v1(15.824,8.524) ; v1@14.147,20.239 14.812,20.903 15.083,20.903 15.169,20.989 15.169,21.569 15.4,21.8 17.8,21.8 18.031,21.569 18.031,21.086 18.217,20.9 21.483,20.9 21.557,20.973 21.557,21.569 21.788,21.8 24.1,21.8 24.331,21.569 D4.2@24.331,21.119
  other v1: 14.147,20.139
LIGHT: R3.1 U1.20 | length 22.2
  Top Layer w0.15: v1(3.875,11) R3.1
  Top Layer w0.2: v1@20.6,4.2 20.6,4.212 U1.20
  Bottom Layer w0.13: 5.088,8.488 9.375,4.2 20.5,4.2 20.529,4.171 v1(20.6,4.1)
  Bottom Layer w0.15: v1(3.875,11) 4.6,11 5.088,10.513 5.088,8.488
LX: C11.2 L1.1 U1.14 U1.15 U1.16 U1.17 U1.18
NetD1_2: D1.2 D2.1 R2.2 | length 12.7
  Top Layer w0.13: R2.2 9.9,15.732 13.615,19.447 v1(14.166,19.447)
  Bottom Layer w0.13: v1(14.166,19.447) 14.219,19.5 15.202,19.5 15.427,19.274 17.991,19.274 D2.1@18.217,19.5
NetD3_2: D3.2 D4.1 R1.2 | length 18.5
  Top Layer w0.13: R1.2 11.4,16.865 13.235,18.7 v1(14.15,18.7)
  Bottom Layer w0.13: v1(14.15,18.7) 14.211,18.7 14.411,18.9 18.833,18.9 19.433,19.5 21.383,19.5 21.483,19.5 21.485,19.498 22.152,19.498 22.65,19 23.972,19 24.165,19.193 24.234,19.262 24.234,19.418 24.316,19.5 D4.1@24.55,19.5
NetD5_2: D5.2 R3.2 | length 1.5
  Top Layer w0.13: D5.2 R3.2
NetR4_2: R4.2 S1.1 | length 5.4
  Top Layer w0.13: S1.1@4.8,17.6 4.8,16.4 6.9,14.3 R4.2
NTC: pad.3 R5.1 U1.10 | length 49.5
  Top Layer w0.13: v1(25.076,5.876) 25.124,5.876 27.085,3.915 28.152,3.915 28.36,4.123 28.36,4.434 v1(28.727,4.801)
  Top Layer w0.15: v1(17.299,9.3) 17.509,9.3 U1.10 ; v1@31.975,0.5 55.3,0.5 55.8,1 R5.1 57.2,1.8 pad.3
  Bottom Layer w0.13: v1(17.299,9.3) 17.299,8.901 19.8,6.4 24.642,6.4 25.076,5.966 v1(25.076,5.876)
  Bottom Layer w0.15: v1(28.727,4.801) 28.794,4.734 28.956,4.734 28.989,4.7 30.642,4.7 30.833,4.508 30.833,1.167 31.4,0.6 v1(31.975,0.6)
RSET: R7.1 U1.21 | length 21.9
  Top Layer w0.15: v1(5.4,11) R7.1
  Top Layer w0.2: v1(21.317,4.097) 21.979,4.76 22.05,4.76 U1.21
  Bottom Layer w0.13: v1(5.4,11) 5.4,8.7 9.515,4.585 20.83,4.585 v1(21.317,4.097)
VBAT+: C12.1 C13.1 C14.1 C15.1 C17.1 J1.1 L1.2 U1.28 | length 29.7
  Top Layer w0.2: U1.28 24.998,6.761 C17.1@26.748,6.761 ; C17.1 27.274,6.864 27.627,6.864 27.696,6.795 28.255,6.795 28.947,6.103 28.947,5.7 27.926,4.679 27.926,4.407 v1@27.868,4.35
  Bottom Layer w2.4: 6.6,1.5 8.1,1.5 22.4,1.5 J1.1@23.694,1.5 ; 21.9,1.5 J1.1@23.6,3.2 ; J1.1@23.794,1.6 26.2,1.6 J1.1
  other v1: 6.3,0.6 6.9,0.6 7.5,0.6 8.1,0.6 5.7,1.2 6.3,1.2 6.9,1.2 7.5,1.2 8.1,1.2 5.7,1.8 6.3,1.8 6.9,1.8 7.5,1.8 8.1,1.8 6.3,2.4 6.9,2.4 7.5,2.4 8.1,2.4 27.868,4.375
VIN: C1.1 Q1.3 U1.30 XP3.1 | length 13.6
  Top Layer w0.13: C1.1 20.142,15.8 19.3,14.958 19.3,13.1 19.625,12.775 v1(20.425,12.775)
  Top Layer w0.15: U1.30@25.529,7.75 25.423,7.75 U1.30 26.15,8.772 v1(26.15,9.147)
  Bottom Layer w0.13: v1(20.425,12.775) 20.487,12.775 20.939,12.324 21.894,12.324 25.071,9.147 v1(26.15,9.147)
VING: Q1.1 R9.1 U1.31 | length 12.8
  Top Layer w0.15: v1(21.025,13.025) 21.025,13.12 21.161,13.256 21.161,13.261 21.587,13.687 21.683,13.687 21.95,13.954 Q1.1 ; Q1.1@21.987,14.037 21.987,14.687 22.3,15 23.7,15 24.4,15.7 R9.1 ; U1.31 25.288,8.888 25.649,9.249 25.649,9.52 25.699,9.57 v1(25.699,9.592)
  Bottom Layer w0.13: v1(21.025,13.025) 21.029,13.025 21.47,12.584 22.038,12.584 25.051,9.57 25.677,9.57 v1(25.699,9.592)
VOUT1: C2.1 Q2.2 U1.37 XP1.1 | length 34.1
  Top Layer w0.15: U1.37 23.579,11.435 23.579,11.587 v1(23.646,11.654)
  Bottom Layer w0.13: v1(23.646,11.654) 23.747,11.654 23.893,11.8 25.229,11.8 27.269,9.76 37.392,9.76 37.667,10.035 54.39,10.035 v1(55.436,8.989)
VOUT1G: Q2.1 U1.36 | length 36.1
  Top Layer w0.13: U1.36 24.052,11.2 v1(24.1,11.2) ; v1(54.737,8.989) 54.737,6.763 55,6.5 55.85,6.5 Q2.1
  Bottom Layer w0.13: v1(24.1,11.2) 25.066,11.2 25.462,11.2 27.162,9.5 27.735,9.5 37.5,9.5 37.775,9.775 53.951,9.775 v1(54.737,8.989)
VOUT2: C10.1 Q3.2 U1.34 XP2.1 | length 14
  Top Layer w0.13: U1.34 24.26,9.949 24.604,10.293 24.976,10.293 v1(24.991,10.277)
  Bottom Layer w0.13: v1(24.991,10.277) 25.057,10.211 25.715,10.211 26.976,8.95 35.675,8.95 36.125,8.5 36.647,8.5 v1(37.136,8.989)
VOUT2G: Q3.1 U1.35 | length 16.9
  Top Layer w0.13: v1(36.437,8.989) 36.5,8.926 36.5,6.9 36.9,6.5 37.55,6.5 Q3.1@37.6,6.45
  Top Layer w0.15: U1.35 24.253,10.694 24.505,10.694 v1(24.546,10.735)
  Bottom Layer w0.13: v1(24.546,10.735) 25.559,10.735 27.069,9.225 36.176,9.225 36.412,8.989 v1(36.437,8.989)
VREG: C16.1 U1.27 | length 2.4
  Top Layer w0.2: U1.27 24.635,6.417 25.583,6.417 C16.1
pads on no net: MH1.0 MH2.0 MH3.0 MH4.0 S1.3 S1.4 S1.5 S1.6 S1.7 U1.2 U1.3 U1.4 U1.5 U1.32 U1.33 XP1.5 XP1.6 XP2.5 XP2.6 XP3.4 XP3.6 XP3.7 XP3.8 XP3.9

## Polygon pours and split planes (outlines as drawn)
+VMID on Top Layer "NONET_L-01_P-001" (solid, remove dead copper, pour order 7): 23.1,13.95 23.1,12.4 30.15,5.35 30.15,4.627 27.579,2.056 24.359,2.056 24,1.697 24,0.329 54.5,0.329 54.5,7.38 ccw(c53.78,7.38) 53.78,8.1 49.383,8.1 ccw(c49.383,6.935) 48.559,7.759 46.3,5.5 36.7,5.5 cw(c36.7,5.968) 36.232,5.968 36.232,7.568 ccw(c35.9,7.568) 35.9,7.9 35.437,7.9 34.952,7.458 31.742,7.458 27.756,11.444 27.756,13.944 ccw(c27.05,13.944) 27.05,14.65 23.8,14.65 ccw(c23.799,13.951)
GND on Top Layer "GND_TOP" (solid, remove dead copper, pour order 9): 0,18.6 0,6.2 3.075,6.2 3.075,7.88 3.88,7.88 11.375,7.88 11.375,12.875 11.375,16.865 13.222,18.6 14.1,18.904 14.1,13.022 15.549,13.022 18.8,13.022 18.8,16.273 20.027,17.5 26.1,17.5 26.1,22.4 13.8,22.4 13.8,20.8 11.6,18.6
+VSYS on Top Layer "NONET_L-01_P-001" (solid, remove dead copper, pour order 5): 19.018,9.418 18.275,10.161 18.275,11.362 17.525,12.075 13.675,12.075 11.124,9.524 ccw(c13.114,7.534) 10.3,7.534 10.3,1.8 ccw(c11.675,1.8) 11.675,0.425 21.625,0.425 22.148,0.948 22.148,2.421 22.564,2.836 23.781,4.054 ccw(c23.48,4.354) 23.781,4.655 23.186,5.25 22.632,5.804 22.06,5.244 22.671,4.633 22.652,4.41 21.821,3.579 20.7,2.458 20.7,1.75 20.55,1.6 15.2,1.6 13.2,3.6 13.2,7.5 15.391,9.691 17.613,9.691 18.452,8.853
LX on Top Layer "LX" (solid, remove dead copper, pour order 4): 19.159,7.226 18.533,6.6 17.993,6.6 17.2,7.4 15.5,7.4 15.5,6.6 15.5,3.8 18.6,3.8 19.303,3.8 19.309,4.135 20.785,5.6
GND on Top Layer "GND_CAP" (solid, remove dead copper, pour order 8): 27.515,2.16 30,4.645 30,5.25 29.013,6.237 28.8,4.8 27.919,3.919 26.943,3.694 26.513,4.123 26.032,3.643
VBAT+ on Top Layer "NONET_L-01_P-001" (solid, remove dead copper, pour order 6): 3.725,7.525 3.725,0.775 ccw(c4.2,0.775) 4.2,0.3 8,0.3 ccw(c8,0.9) 8.6,0.9 8.6,7.25 ccw(c8.175,7.25) 8.175,7.675 3.867,7.675
VOUT1 on Top Layer "VOUT1" (solid, remove dead copper, pour order 2): 57.549,10.85 57.549,9.749 cw(c57.1,9.749) 57.1,9.3 55.4,9.3 ccw(c55.4,9) 55.1,9 55.1,8 ccw(c55.375,8) 55.375,7.725 58.225,7.725 ccw(c58.225,8.549) 59.049,8.549 59.049,10.85
VIN on Top Layer "VIN" (solid, remove dead copper, pour order 0): 20.89,17.8 20.89,17.09 20,16.2 20,15.325 23.325,15.325 ccw(c23.325,15.6) 23.6,15.6 23.6,16.6 ccw(c23.3,16.6) 23.3,16.9 21.56,16.9 21.31,17.15 21.31,17.8
VOUT2 on Top Layer "VOUT2" (solid, remove dead copper, pour order 1): 39.249,10.85 39.249,9.899 cw(c38.85,9.899) 38.85,9.5 37.25,9.5 ccw(c37.25,9.05) 36.8,9.05 36.8,8 ccw(c37.075,8) 37.075,7.725 39.925,7.725 ccw(c39.925,8.549) 40.749,8.549 40.749,10.85
GND on Bottom Layer "GND_BOT" (solid, remove dead copper, pour order 10): 0,0 0,1.5 0.9,1.5 ccw(c0.9,1.9) 1.3,1.9 1.3,5.5 ccw(c0.9,5.5) 0.9,5.9 0,5.9 0,18.6 10.1,18.6 11.6,18.6 ccw(c11.6,19) 12,19 12,20.4 13.4,20.4 ccw(c13.4,20.8) 13.8,20.8 13.8,22.4 26.1,22.4 26.1,18 ccw(c26.5,18) 26.5,17.6 26.9,17.6 ccw(c26.9,18) 27.3,18 27.3,22 29.9,22 29.9,12.546 ccw(c30.1,12.2) 30.5,12.2 42.7,12.2 ccw(c43.1,12.2) 43.3,12.546 43.3,22 48.2,22 48.2,12.546 ccw(c48.4,12.2) 48.8,12.2 61,12.2 ccw(c61.4,12.2) 61.6,12.546 61.6,21 65,21 65,5.9 64.1,5.9 ccw(c64.1,5.5) 63.7,5.5 63.7,1.9 ccw(c64.1,1.9) 64.1,1.5 65,1.5 65,0

## Keep-outs
Keep-Out Layer:
  lines w0.2: 43.2,22 43.2,12.546 cw(c43,12.2) 42.6,12.2 30.4,12.2 cw(c30,12.2) 29.8,12.546 29.8,22 27.3,22 27.3,18 cw(c26.9,18) 26.9,17.6 26.5,17.6 cw(c26.5,18) 26.1,18 26.1,22.4 13.8,22.4 13.8,20.8 cw(c13.4,20.8) 13.4,20.4 12,20.4 12,19 cw(c11.6,19) 11.6,18.6 10.1,18.6 cw(c10.1,19) 9.7,19 9.7,20.4 0,20.4 0,5.9 0.9,5.9 cw(c0.9,5.5) 1.3,5.5 1.3,1.9 cw(c0.9,1.9) 0.9,1.5 0,1.5 0,0 65,0 65,1.5 64.1,1.5 cw(c64.1,1.9) 63.7,1.9 63.7,5.5 cw(c64.1,5.5) 64.1,5.9 65,5.9 65,21.15 61.5,21.15 61.5,12.546 cw(c61.3,12.2) 60.9,12.2 48.7,12.2 cw(c48.3,12.2) 48.1,12.546 48.1,22 43.3,22

## Other copper
Top Layer:
  region net GND: 48.9,11.5 48.9,8.8 ccw(c49.3,8.8) 49.3,8.4 52.3,8.4 ccw(c52.3,8.8) 52.7,8.8 52.7,9.6 52.7,11.5 ccw(c52.3,11.5) 52.3,11.9 49.3,11.9 ccw(c49.3,11.5)
  region net GND: 31.6,11.5 31.6,7.8 31.8,7.6 34.4,7.6 34.95,7.6 35.2,7.85 35.2,8.8 34.4,9.6 34.4,11.5 ccw(c34,11.5) 34,11.9 32,11.9 ccw(c32,11.5)
  region net GND: 1.9,7.55 1.65,7.3 1.65,6.7 1.9,6.45 2.6,6.45 2.6,7 2.6,7.55
  region net GND: 18.15,13.9 17.9,14.15 17.3,14.15 17.05,13.9 17.05,13.2 17.6,13.2 18.15,13.2
  region net GND: 16.25,13.9 16,14.15 15.4,14.15 15.15,13.9 15.15,13.2 15.7,13.2 16.25,13.2
  region net GND: 20.35,3.15 20.1,3.4 19.5,3.4 19.25,3.15 19.25,2.45 19.8,2.45 20.35,2.45
  region net GND: 18.45,3.15 18.2,3.4 17.6,3.4 17.35,3.15 17.35,2.45 17.9,2.45 18.45,2.45
  region net GND: 1.9,1.85 1.65,1.6 1.65,1 1.9,0.75 2.6,0.75 2.6,1.3 2.6,1.85
  region net GND: 1.9,3.75 1.65,3.5 1.65,2.9 1.9,2.65 2.6,2.65 2.6,3.2 2.6,3.75
  region net GND: 1.9,5.65 1.65,5.4 1.65,4.8 1.9,4.55 2.6,4.55 2.6,5.1 2.6,5.65
  region net GND: 57.05,5.9 57.3,5.65 57.9,5.65 58.15,5.9 58.15,6.6 57.6,6.6 57.05,6.6
  region net GND: 38.75,5.9 39,5.65 39.6,5.65 39.85,5.9 39.85,6.6 39.3,6.6 38.75,6.6
  region net GND: 19.75,13.5 20,13.25 20.6,13.25 20.85,13.5 20.85,14.2 20.3,14.2 19.75,14.2

## Silkscreen, mask and mechanical layers (free items; w line width, h text height)
Top Overlay:
  text "NTC" at 56.6,3.5 h0.8
  text "GND" at 60,3.5 h0.8
  text "'.Project_Name' '.rev'  '.ModifiedDate'" at 31.442,0.753 h1
Bottom Overlay:
  lines w0.5: 25.9,6.1 28.1,6.1 ; 27,5 27,7.2 ; 45.5,6.1 47.7,6.1
Mechanical 1:
  the board outline again, w0.2
Mechanical 13:
  text "Assembly Top Layer" at 6.468,27.518 h3
  text ".VariantName" at 21.702,24.201 h1.2
  text "Variant Name:" at 6.427,24.176 h1.2
  text ".Pcb_File_Name_No_Path" at 21.3,-3.9 h1.2
Mechanical 14:
  text "Assembly Bottom Layer" at 63,27.5 h3
  text ".VariantName" at 47.302,24.001 h1.2
  text "Variant Name:" at 63.002,24.001 h1.2
  text ".Pcb_File_Name_No_Path" at 41.7,-3.8 h1.2

## Dimensions
65,0 to 65,21.15 on Mechanical 2
0,0 to 65,0 on Mechanical 2